# EAGLE board six4mix_stencil (EAGLE 9.6.2), part 1 of 2
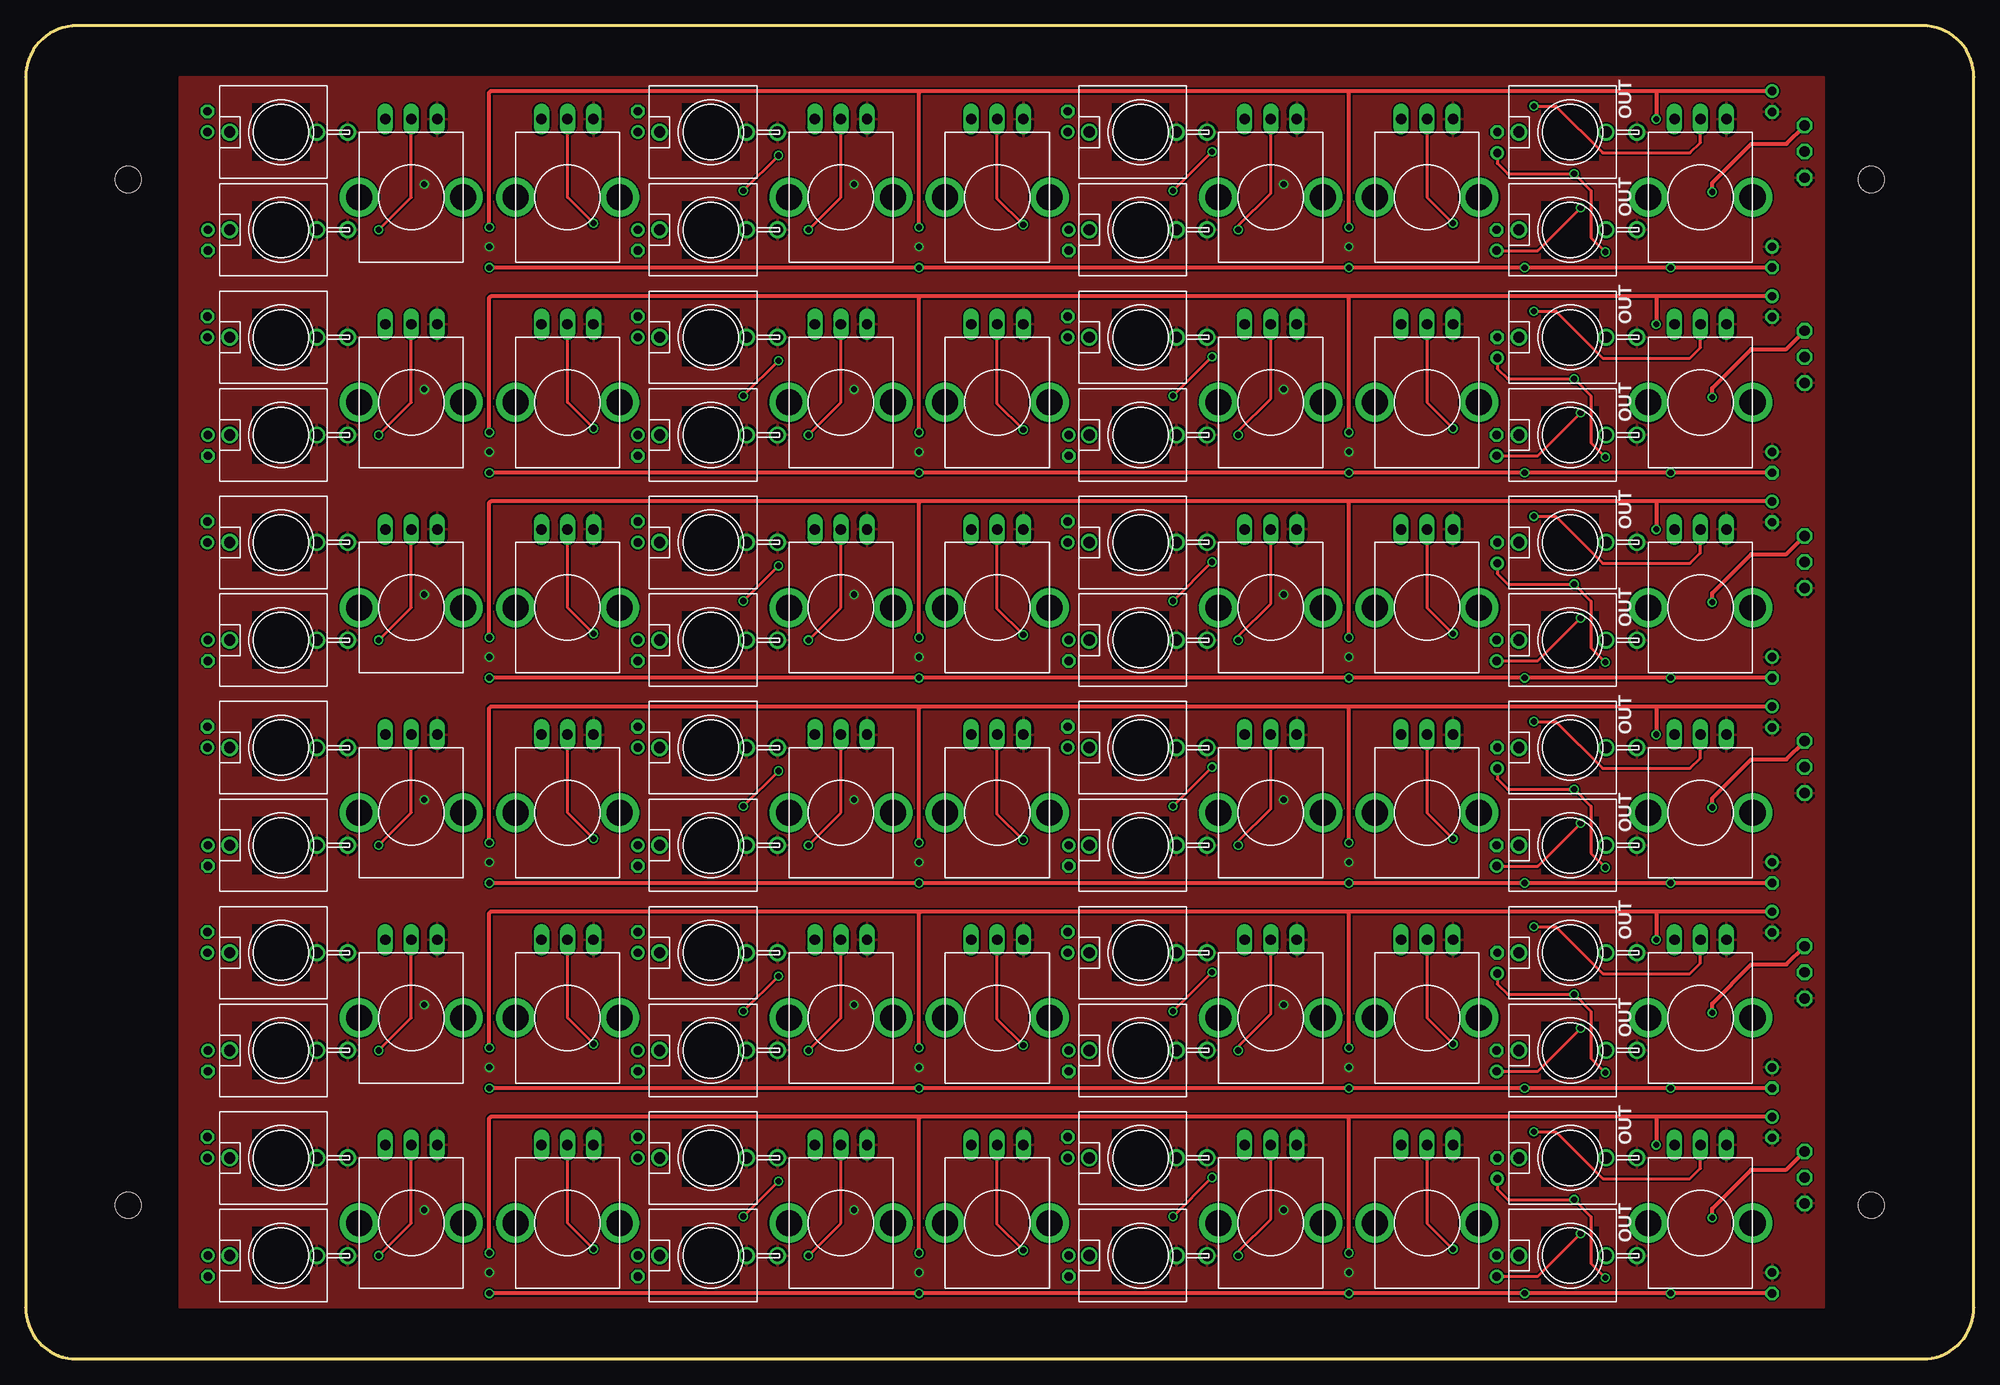
[diagram p0: board, top side]
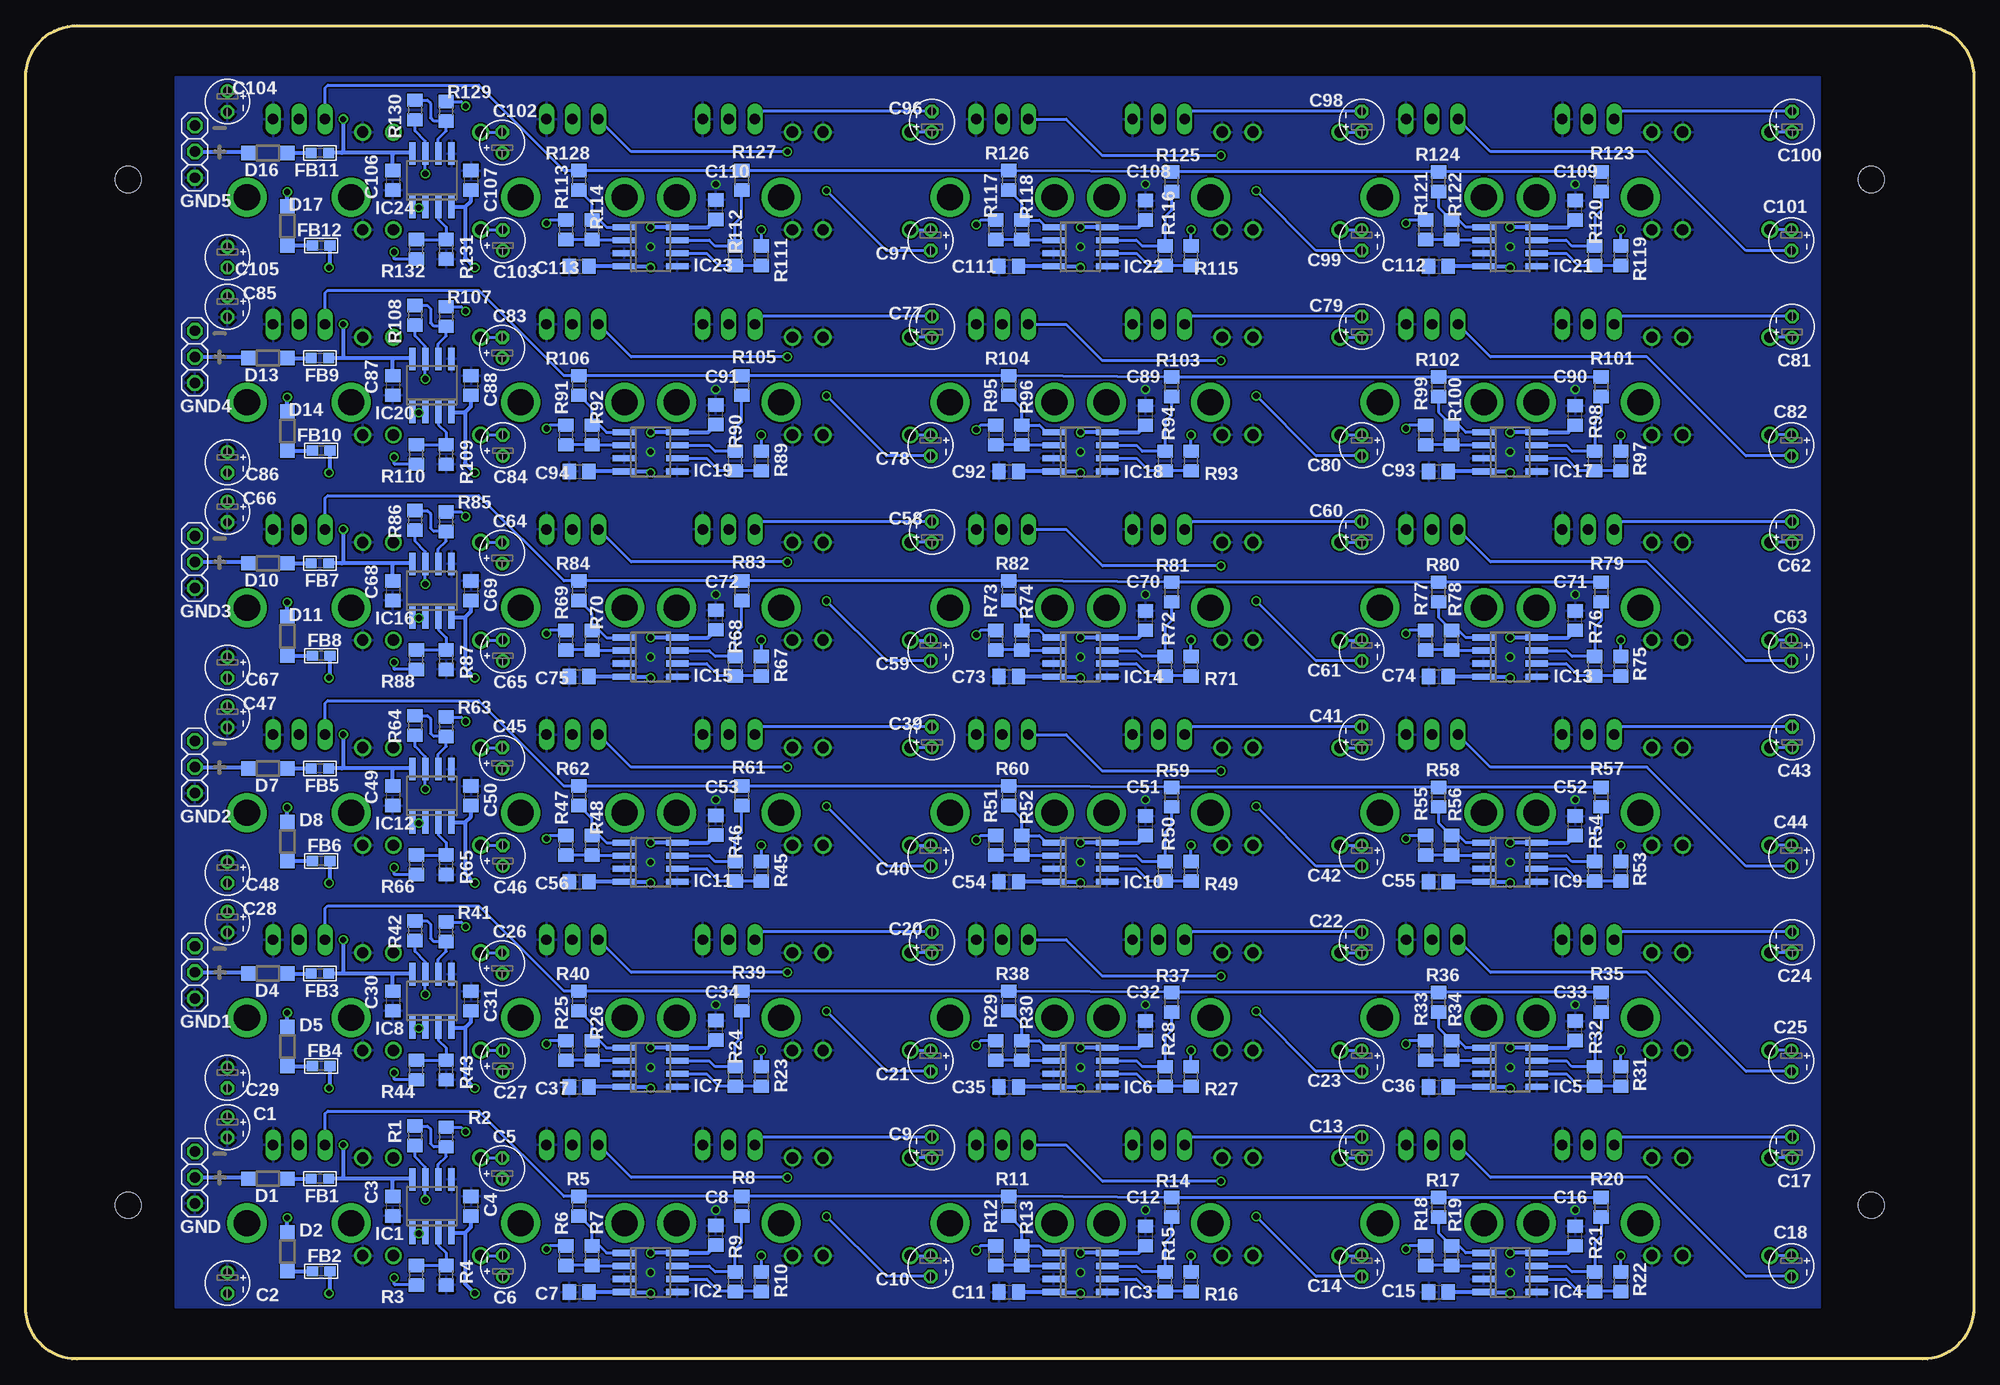
[diagram p1: board, bottom side, seen from below]

Size 190 x 130 mm. Coordinates in mm from the lower left corner, seen from the top.
Outline: 0,125 0,5 arc90 5,0 185,0 arc90 190,5 190,125 arc90 185,130 5,130 arc90 0,125
Copper layers (1*16): Top 0.035mm / dielectric 1.5mm / Bottom 0.035mm
Design rules "hackvana": minimum track width 6mil, minimum drill 0.3mm, track to track 6mil, track to pad 9mil, pad to pad 6mil, via to via 6mil, smd to smd 0mil, copper to edge 6mil, drill to drill 6mil, minimum pad ring 10mil, minimum via ring 6mil, stop-mask expansion 2mil, vias tented up to drill 100mil, thermal gap 10mil
Holes 2.54 mm at 10,115 180,115 180,15 10,15

## Footprints (pad centres in the part's own frame; a part is rotated, then mirrored left to right if it is on the bottom)
1X01 = drill 1.016 octagon: 1 0,0
WQP-PJ301M-12_JACK = drill 1.1: P$1 0,5; P$2 0,-3.5; P$3 0,-6.5
E2-4 = drill 0.813 pad 1.27: + -1.016,0 | drill 0.813 pad 1.27 octagon: - 1.016,0
C0805 = smd 1.3 x 1.5: 1 -0.95,0; 2 0.95,0
SOD123 = smd 1.4 x 1.4: A 1.9,0; C -1.9,0
0603 = smd 1.1 x 1: 1 -0.85,0; 2 0.85,0
SO08 = smd 0.6 x 2.2: 1 -1.905,-2.6; 2 -0.635,-2.6; 3 0.635,-2.6; 4 1.905,-2.6; 5 1.905,2.6; 6 0.635,2.6; 7 -0.635,2.6; 8 -1.905,2.6
SMALL_ALPS_POT = drill 1.016 long: A -2.54,-7.62; B 2.54,-7.62; W 0,-7.62 | drill 2.54 pad 3.81: GND@1 -5.08,0; GND@2 5.08,0
R0805 = smd 1.3 x 1.5: 1 -0.95,0; 2 0.95,0

## Placement (x,y rotation side)
+1  [1X01]  173.5,37.7 0 bottom
+2  [1X01]  173.5,57.7 0 bottom
+3  [1X01]  173.5,77.71 0 bottom
+4  [1X01]  173.5,97.71 0 bottom
+5  [1X01]  173.5,117.71 0 bottom
+12  [1X01]  173.5,17.7 0 bottom
-1  [1X01]  173.5,40.24 0 bottom
-2  [1X01]  173.5,60.24 0 bottom
-3  [1X01]  173.5,80.25 0 bottom
-4  [1X01]  173.5,100.25 0 bottom
-5  [1X01]  173.5,120.25 0 bottom
-12  [1X01]  173.5,20.24 0 bottom
A  WQP-PJ301M-12_JACK  [WQP-PJ301M-12_JACK]  24.91,19.61 90 top
A1  WQP-PJ301M-12_JACK  [WQP-PJ301M-12_JACK]  24.91,39.61 90 top
A2  WQP-PJ301M-12_JACK  [WQP-PJ301M-12_JACK]  24.91,59.61 90 top
A3  WQP-PJ301M-12_JACK  [WQP-PJ301M-12_JACK]  24.91,79.61 90 top
A4  WQP-PJ301M-12_JACK  [WQP-PJ301M-12_JACK]  24.91,99.61 90 top
A5  WQP-PJ301M-12_JACK  [WQP-PJ301M-12_JACK]  24.91,119.62 90 top
B  WQP-PJ301M-12_JACK  [WQP-PJ301M-12_JACK]  24.91,10.08 90 top
B1  WQP-PJ301M-12_JACK  [WQP-PJ301M-12_JACK]  24.91,30.08 90 top
B2  WQP-PJ301M-12_JACK  [WQP-PJ301M-12_JACK]  24.91,50.09 90 top
B3  WQP-PJ301M-12_JACK  [WQP-PJ301M-12_JACK]  24.91,70.09 90 top
B4  WQP-PJ301M-12_JACK  [WQP-PJ301M-12_JACK]  24.91,90.09 90 top
B5  WQP-PJ301M-12_JACK  [WQP-PJ301M-12_JACK]  24.91,110.09 90 top
C  WQP-PJ301M-12_JACK  [WQP-PJ301M-12_JACK]  66.82,19.61 90 top
C1  [E2-4]  170.32,22.59 270 bottom
C2  [E2-4]  170.32,7.41 270 bottom
C3  [C0805]  154.19,14.91 270 bottom
C4  [C0805]  146.57,14.91 270 bottom
C5  [E2-4]  143.52,18.59 90 bottom
C6  [E2-4]  143.46,9.06 90 bottom
C7  [C0805]  136.03,6.52 0 bottom
C8  [C0805]  122.7,12.05 90 bottom
C9  [E2-4]  101.61,20.62 90 bottom
C10  [E2-4]  101.74,9.06 270 bottom
C11  [C0805]  94.12,6.52 0 bottom
C12  [C0805]  80.79,11.98 90 bottom
C13  [E2-4]  59.7,20.62 90 bottom
C14  [E2-4]  59.7,9.06 270 bottom
C15  [C0805]  52.21,6.52 0 bottom
C16  [C0805]  38.88,11.98 90 bottom
C17  [E2-4]  17.73,20.62 90 bottom
C18  [E2-4]  17.79,9.06 270 bottom
C19  WQP-PJ301M-12_JACK  [WQP-PJ301M-12_JACK]  66.82,39.61 90 top
C20  [E2-4]  101.61,40.62 90 bottom
C21  [E2-4]  101.74,29.07 270 bottom
C22  [E2-4]  59.7,40.62 90 bottom
C23  [E2-4]  59.7,29.07 270 bottom
C24  [E2-4]  17.73,40.62 90 bottom
C25  [E2-4]  17.79,29.07 270 bottom
C26  [E2-4]  143.52,38.59 90 bottom
C27  [E2-4]  143.46,29.07 90 bottom
C28  [E2-4]  170.32,42.59 270 bottom
C29  [E2-4]  170.32,27.42 270 bottom
C30  [C0805]  154.19,34.91 270 bottom
C31  [C0805]  146.57,34.91 270 bottom
C32  [C0805]  80.79,31.99 90 bottom
C33  [C0805]  38.88,31.99 90 bottom
C34  [C0805]  122.7,32.05 90 bottom
C35  [C0805]  94.12,26.53 0 bottom
C36  [C0805]  52.21,26.53 0 bottom
C37  [C0805]  136.03,26.53 0 bottom
C38  WQP-PJ301M-12_JACK  [WQP-PJ301M-12_JACK]  66.82,59.61 90 top
C39  [E2-4]  101.61,60.63 90 bottom
C40  [E2-4]  101.74,49.07 270 bottom
C41  [E2-4]  59.7,60.63 90 bottom
C42  [E2-4]  59.7,49.07 270 bottom
C43  [E2-4]  17.73,60.63 90 bottom
C44  [E2-4]  17.79,49.07 270 bottom
C45  [E2-4]  143.52,58.59 90 bottom
C46  [E2-4]  143.46,49.07 90 bottom
C47  [E2-4]  170.32,62.59 270 bottom
C48  [E2-4]  170.32,47.42 270 bottom
C49  [C0805]  154.19,54.91 270 bottom
C50  [C0805]  146.57,54.91 270 bottom
C51  [C0805]  80.79,51.99 90 bottom
C52  [C0805]  38.88,51.99 90 bottom
C53  [C0805]  122.7,52.05 90 bottom
C54  [C0805]  94.12,46.53 0 bottom
C55  [C0805]  52.21,46.53 0 bottom
C56  [C0805]  136.03,46.53 0 bottom
C57  WQP-PJ301M-12_JACK  [WQP-PJ301M-12_JACK]  66.82,79.61 90 top
C58  [E2-4]  101.61,80.63 90 bottom
C59  [E2-4]  101.74,69.07 270 bottom
C60  [E2-4]  59.7,80.63 90 bottom
C61  [E2-4]  59.7,69.07 270 bottom
C62  [E2-4]  17.73,80.63 90 bottom
C63  [E2-4]  17.79,69.07 270 bottom
C64  [E2-4]  143.52,78.6 90 bottom
C65  [E2-4]  143.46,69.07 90 bottom
C66  [E2-4]  170.32,82.6 270 bottom
C67  [E2-4]  170.32,67.42 270 bottom
C68  [C0805]  154.19,74.91 270 bottom
C69  [C0805]  146.57,74.91 270 bottom
C70  [C0805]  80.79,71.99 90 bottom
C71  [C0805]  38.88,71.99 90 bottom
C72  [C0805]  122.7,72.06 90 bottom
C73  [C0805]  94.12,66.53 0 bottom
C74  [C0805]  52.21,66.53 0 bottom
C75  [C0805]  136.03,66.53 0 bottom
C76  WQP-PJ301M-12_JACK  [WQP-PJ301M-12_JACK]  66.82,99.61 90 top
C77  [E2-4]  101.61,100.63 90 bottom
C78  [E2-4]  101.74,89.07 270 bottom
C79  [E2-4]  59.7,100.63 90 bottom
C80  [E2-4]  59.7,89.07 270 bottom
C81  [E2-4]  17.73,100.63 90 bottom
C82  [E2-4]  17.79,89.07 270 bottom
C83  [E2-4]  143.52,98.6 90 bottom
C84  [E2-4]  143.46,89.07 90 bottom
C85  [E2-4]  170.32,102.6 270 bottom
C86  [E2-4]  170.32,87.42 270 bottom
C87  [C0805]  154.19,94.92 270 bottom
C88  [C0805]  146.57,94.92 270 bottom
C89  [C0805]  80.79,92 90 bottom
C90  [C0805]  38.88,92 90 bottom
C91  [C0805]  122.7,92.06 90 bottom
C92  [C0805]  94.12,86.53 0 bottom
C93  [C0805]  52.21,86.53 0 bottom
C94  [C0805]  136.03,86.53 0 bottom
C95  WQP-PJ301M-12_JACK  [WQP-PJ301M-12_JACK]  66.82,119.62 90 top
C96  [E2-4]  101.61,120.63 90 bottom
C97  [E2-4]  101.74,109.08 270 bottom
C98  [E2-4]  59.7,120.63 90 bottom
C99  [E2-4]  59.7,109.08 270 bottom
C100  [E2-4]  17.73,120.63 90 bottom
C101  [E2-4]  17.79,109.08 270 bottom
C102  [E2-4]  143.52,118.6 90 bottom
C103  [E2-4]  143.46,109.08 90 bottom
C104  [E2-4]  170.32,122.6 270 bottom
C105  [E2-4]  170.32,107.43 270 bottom
C106  [C0805]  154.19,114.92 270 bottom
C107  [C0805]  146.57,114.92 270 bottom
C108  [C0805]  80.79,112 90 bottom
C109  [C0805]  38.88,112 90 bottom
C110  [C0805]  122.7,112.06 90 bottom
C111  [C0805]  94.12,106.54 0 bottom
C112  [C0805]  52.21,106.54 0 bottom
C113  [C0805]  136.03,106.54 0 bottom
D  WQP-PJ301M-12_JACK  [WQP-PJ301M-12_JACK]  66.82,10.08 90 top
D1  MBR0520LT  [SOD123]  166.38,17.57 180 bottom
D2  MBR0520LT  [SOD123]  164.48,10.46 270 bottom
D3  WQP-PJ301M-12_JACK  [WQP-PJ301M-12_JACK]  66.82,30.08 90 top
D4  MBR0520LT  [SOD123]  166.38,37.58 180 bottom
D5  MBR0520LT  [SOD123]  164.48,30.46 270 bottom
D6  WQP-PJ301M-12_JACK  [WQP-PJ301M-12_JACK]  66.82,50.09 90 top
D7  MBR0520LT  [SOD123]  166.38,57.58 180 bottom
D8  MBR0520LT  [SOD123]  164.48,50.47 270 bottom
D9  WQP-PJ301M-12_JACK  [WQP-PJ301M-12_JACK]  66.82,70.09 90 top
D10  MBR0520LT  [SOD123]  166.38,77.58 180 bottom
D11  MBR0520LT  [SOD123]  164.48,70.47 270 bottom
D12  WQP-PJ301M-12_JACK  [WQP-PJ301M-12_JACK]  66.82,90.09 90 top
D13  MBR0520LT  [SOD123]  166.38,97.58 180 bottom
D14  MBR0520LT  [SOD123]  164.48,90.47 270 bottom
D15  WQP-PJ301M-12_JACK  [WQP-PJ301M-12_JACK]  66.82,110.09 90 top
D16  MBR0520LT  [SOD123]  166.38,117.59 180 bottom
D17  MBR0520LT  [SOD123]  164.48,110.47 270 bottom
E  WQP-PJ301M-12_JACK  [WQP-PJ301M-12_JACK]  108.73,19.61 90 top
E1  WQP-PJ301M-12_JACK  [WQP-PJ301M-12_JACK]  108.73,39.61 90 top
E2  WQP-PJ301M-12_JACK  [WQP-PJ301M-12_JACK]  108.73,59.61 90 top
E3  WQP-PJ301M-12_JACK  [WQP-PJ301M-12_JACK]  108.73,79.61 90 top
E4  WQP-PJ301M-12_JACK  [WQP-PJ301M-12_JACK]  108.73,99.61 90 top
E5  WQP-PJ301M-12_JACK  [WQP-PJ301M-12_JACK]  108.73,119.62 90 top
EURO  WQP-PJ301M-12_JACK  [WQP-PJ301M-12_JACK]  150.64,19.61 90 top
EURO1  WQP-PJ301M-12_JACK  [WQP-PJ301M-12_JACK]  150.64,39.61 90 top
EURO2  WQP-PJ301M-12_JACK  [WQP-PJ301M-12_JACK]  150.64,59.61 90 top
EURO3  WQP-PJ301M-12_JACK  [WQP-PJ301M-12_JACK]  150.64,79.61 90 top
EURO4  WQP-PJ301M-12_JACK  [WQP-PJ301M-12_JACK]  150.64,99.61 90 top
EURO5  WQP-PJ301M-12_JACK  [WQP-PJ301M-12_JACK]  150.64,119.62 90 top
F  WQP-PJ301M-12_JACK  [WQP-PJ301M-12_JACK]  108.73,10.08 90 top
F1  WQP-PJ301M-12_JACK  [WQP-PJ301M-12_JACK]  108.73,30.08 90 top
F2  WQP-PJ301M-12_JACK  [WQP-PJ301M-12_JACK]  108.73,50.09 90 top
F3  WQP-PJ301M-12_JACK  [WQP-PJ301M-12_JACK]  108.73,70.09 90 top
F4  WQP-PJ301M-12_JACK  [WQP-PJ301M-12_JACK]  108.73,90.09 90 top
F5  WQP-PJ301M-12_JACK  [WQP-PJ301M-12_JACK]  108.73,110.09 90 top
FB1  [0603]  161.3,17.57 180 bottom
FB2  [0603]  161.18,8.56 180 bottom
FB3  [0603]  161.3,37.58 180 bottom
FB4  [0603]  161.18,28.56 180 bottom
FB5  [0603]  161.3,57.58 180 bottom
FB6  [0603]  161.18,48.56 180 bottom
FB7  [0603]  161.3,77.58 180 bottom
FB8  [0603]  161.18,68.56 180 bottom
FB9  [0603]  161.3,97.58 180 bottom
FB10  [0603]  161.18,88.57 180 bottom
FB11  [0603]  161.3,117.59 180 bottom
FB12  [0603]  161.18,108.57 180 bottom
GND  [1X01]  173.5,15.16 0 bottom
GND1  [1X01]  173.5,35.16 0 bottom
GND2  [1X01]  173.5,55.16 0 bottom
GND3  [1X01]  173.5,75.17 0 bottom
GND4  [1X01]  173.5,95.17 0 bottom
GND5  [1X01]  173.5,115.17 0 bottom
IC1  TL072D  [SO08]  150.38,14.91 0 bottom
IC2  TL072D  [SO08]  129.05,8.43 270 bottom
IC3  TL072D  [SO08]  87.14,8.43 270 bottom
IC4  TL072D  [SO08]  45.23,8.43 270 bottom
IC5  TL072D  [SO08]  45.23,28.43 270 bottom
IC6  TL072D  [SO08]  87.14,28.43 270 bottom
IC7  TL072D  [SO08]  129.05,28.43 270 bottom
IC8  TL072D  [SO08]  150.38,34.91 0 bottom
IC9  TL072D  [SO08]  45.23,48.43 270 bottom
IC10  TL072D  [SO08]  87.14,48.43 270 bottom
IC11  TL072D  [SO08]  129.05,48.43 270 bottom
IC12  TL072D  [SO08]  150.38,54.91 0 bottom
IC13  TL072D  [SO08]  45.23,68.44 270 bottom
IC14  TL072D  [SO08]  87.14,68.44 270 bottom
IC15  TL072D  [SO08]  129.05,68.44 270 bottom
IC16  TL072D  [SO08]  150.38,74.91 0 bottom
IC17  TL072D  [SO08]  45.23,88.44 270 bottom
IC18  TL072D  [SO08]  87.14,88.44 270 bottom
IC19  TL072D  [SO08]  129.05,88.44 270 bottom
IC20  TL072D  [SO08]  150.38,94.92 0 bottom
IC21  TL072D  [SO08]  45.23,108.44 270 bottom
IC22  TL072D  [SO08]  87.14,108.44 270 bottom
IC23  TL072D  [SO08]  129.05,108.44 270 bottom
IC24  TL072D  [SO08]  150.38,114.92 0 bottom
LINE  WQP-PJ301M-12_JACK  [WQP-PJ301M-12_JACK]  150.64,10.08 90 top
LINE1  WQP-PJ301M-12_JACK  [WQP-PJ301M-12_JACK]  150.64,30.08 90 top
LINE2  WQP-PJ301M-12_JACK  [WQP-PJ301M-12_JACK]  150.64,50.09 90 top
LINE3  WQP-PJ301M-12_JACK  [WQP-PJ301M-12_JACK]  150.64,70.09 90 top
LINE4  WQP-PJ301M-12_JACK  [WQP-PJ301M-12_JACK]  150.64,90.09 90 top
LINE5  WQP-PJ301M-12_JACK  [WQP-PJ301M-12_JACK]  150.64,110.09 90 top
LVLA  ALPS_POT_SMALL  [SMALL_ALPS_POT]  37.61,13.26 180 top
LVLA1  ALPS_POT_SMALL  [SMALL_ALPS_POT]  37.61,33.26 180 top
LVLA2  ALPS_POT_SMALL  [SMALL_ALPS_POT]  37.61,53.26 180 top
LVLA3  ALPS_POT_SMALL  [SMALL_ALPS_POT]  37.61,73.26 180 top
LVLA4  ALPS_POT_SMALL  [SMALL_ALPS_POT]  37.61,93.27 180 top
LVLA5  ALPS_POT_SMALL  [SMALL_ALPS_POT]  37.61,113.27 180 top
LVLB  ALPS_POT_SMALL  [SMALL_ALPS_POT]  52.85,13.26 180 top
LVLB1  ALPS_POT_SMALL  [SMALL_ALPS_POT]  52.85,33.26 180 top
LVLB2  ALPS_POT_SMALL  [SMALL_ALPS_POT]  52.85,53.26 180 top
LVLB3  ALPS_POT_SMALL  [SMALL_ALPS_POT]  52.85,73.26 180 top
LVLB4  ALPS_POT_SMALL  [SMALL_ALPS_POT]  52.85,93.27 180 top
LVLB5  ALPS_POT_SMALL  [SMALL_ALPS_POT]  52.85,113.27 180 top
LVLC  ALPS_POT_SMALL  [SMALL_ALPS_POT]  79.52,13.26 180 top
LVLC1  ALPS_POT_SMALL  [SMALL_ALPS_POT]  79.52,33.26 180 top
LVLC2  ALPS_POT_SMALL  [SMALL_ALPS_POT]  79.52,53.26 180 top
LVLC3  ALPS_POT_SMALL  [SMALL_ALPS_POT]  79.52,73.26 180 top
LVLC4  ALPS_POT_SMALL  [SMALL_ALPS_POT]  79.52,93.27 180 top
LVLC5  ALPS_POT_SMALL  [SMALL_ALPS_POT]  79.52,113.27 180 top
LVLD  ALPS_POT_SMALL  [SMALL_ALPS_POT]  94.76,13.26 180 top
LVLD1  ALPS_POT_SMALL  [SMALL_ALPS_POT]  94.76,33.26 180 top
LVLD2  ALPS_POT_SMALL  [SMALL_ALPS_POT]  94.76,53.26 180 top
LVLD3  ALPS_POT_SMALL  [SMALL_ALPS_POT]  94.76,73.26 180 top
LVLD4  ALPS_POT_SMALL  [SMALL_ALPS_POT]  94.76,93.27 180 top
LVLD5  ALPS_POT_SMALL  [SMALL_ALPS_POT]  94.76,113.27 180 top
LVLE  ALPS_POT_SMALL  [SMALL_ALPS_POT]  121.43,13.26 180 top
LVLE1  ALPS_POT_SMALL  [SMALL_ALPS_POT]  121.43,33.26 180 top
LVLE2  ALPS_POT_SMALL  [SMALL_ALPS_POT]  121.43,53.26 180 top
LVLE3  ALPS_POT_SMALL  [SMALL_ALPS_POT]  121.43,73.26 180 top
LVLE4  ALPS_POT_SMALL  [SMALL_ALPS_POT]  121.43,93.27 180 top
LVLE5  ALPS_POT_SMALL  [SMALL_ALPS_POT]  121.43,113.27 180 top
LVLF  ALPS_POT_SMALL  [SMALL_ALPS_POT]  136.67,13.26 180 top
LVLF1  ALPS_POT_SMALL  [SMALL_ALPS_POT]  136.67,33.26 180 top
LVLF2  ALPS_POT_SMALL  [SMALL_ALPS_POT]  136.67,53.26 180 top
LVLF3  ALPS_POT_SMALL  [SMALL_ALPS_POT]  136.67,73.26 180 top
LVLF4  ALPS_POT_SMALL  [SMALL_ALPS_POT]  136.67,93.27 180 top
LVLF5  ALPS_POT_SMALL  [SMALL_ALPS_POT]  136.67,113.27 180 top
R1  100k  [R0805]  152.03,21.76 270 bottom
R2  10k  [R0805]  148.99,21.64 270 bottom
R3  47k  [R0805]  151.91,8.18 90 bottom
R4  10k  [R0805]  148.99,8.18 90 bottom
R5  [R0805]  136.03,14.91 90 bottom
R6  4k7  [R0805]  137.3,10.08 270 bottom
R7  10k  [R0805]  134.76,10.08 90 bottom
R8  [R0805]  120.16,14.91 90 bottom
R9  10k  [R0805]  120.79,7.54 90 bottom
R10  4k7  [R0805]  118.25,7.54 270 bottom
R11  [R0805]  94.12,14.91 90 bottom
R12  4k7  [R0805]  95.39,10.08 270 bottom
R13  10k  [R0805]  92.85,10.08 90 bottom
R14  [R0805]  78.25,14.78 90 bottom
R15  10k  [R0805]  78.88,7.54 90 bottom
R16  4k7  [R0805]  76.34,7.54 270 bottom
R17  [R0805]  52.21,14.78 90 bottom
R18  4k7  [R0805]  53.48,10.08 270 bottom
R19  10k  [R0805]  50.94,10.08 90 bottom
R20  [R0805]  36.34,14.78 90 bottom
R21  10k  [R0805]  36.97,7.54 90 bottom
R22  4k7  [R0805]  34.43,7.54 270 bottom
R23  4k7  [R0805]  118.25,27.54 270 bottom
R24  10k  [R0805]  120.79,27.54 90 bottom
R25  4k7  [R0805]  137.3,30.08 270 bottom
R26  10k  [R0805]  134.76,30.08 90 bottom
R27  4k7  [R0805]  76.34,27.54 270 bottom
R28  10k  [R0805]  78.88,27.54 90 bottom
R29  4k7  [R0805]  95.39,30.08 270 bottom
R30  10k  [R0805]  92.85,30.08 90 bottom
R31  4k7  [R0805]  34.43,27.54 270 bottom
R32  10k  [R0805]  36.97,27.54 90 bottom
R33  4k7  [R0805]  53.48,30.08 270 bottom
R34  10k  [R0805]  50.94,30.08 90 bottom
R35  [R0805]  36.34,34.78 90 bottom
R36  [R0805]  52.21,34.78 90 bottom
R37  [R0805]  78.25,34.78 90 bottom
R38  [R0805]  94.12,34.91 90 bottom
R39  [R0805]  120.16,34.91 90 bottom
R40  [R0805]  136.03,34.91 90 bottom
R41  10k  [R0805]  148.99,41.64 270 bottom
R42  100k  [R0805]  152.03,41.77 270 bottom
R43  10k  [R0805]  148.99,28.18 90 bottom
R44  47k  [R0805]  151.91,28.18 90 bottom
R45  4k7  [R0805]  118.25,47.55 270 bottom
R46  10k  [R0805]  120.79,47.55 90 bottom
R47  4k7  [R0805]  137.3,50.09 270 bottom
R48  10k  [R0805]  134.76,50.09 90 bottom
R49  4k7  [R0805]  76.34,47.55 270 bottom
R50  10k  [R0805]  78.88,47.55 90 bottom
R51  4k7  [R0805]  95.39,50.09 270 bottom
R52  10k  [R0805]  92.85,50.09 90 bottom
R53  4k7  [R0805]  34.43,47.55 270 bottom
R54  10k  [R0805]  36.97,47.55 90 bottom
R55  4k7  [R0805]  53.48,50.09 270 bottom
R56  10k  [R0805]  50.94,50.09 90 bottom
R57  [R0805]  36.34,54.78 90 bottom
R58  [R0805]  52.21,54.78 90 bottom
R59  [R0805]  78.25,54.78 90 bottom
R60  [R0805]  94.12,54.91 90 bottom
R61  [R0805]  120.16,54.91 90 bottom
R62  [R0805]  136.03,54.91 90 bottom
R63  10k  [R0805]  148.99,61.64 270 bottom
R64  100k  [R0805]  152.03,61.77 270 bottom
R65  10k  [R0805]  148.99,48.18 90 bottom
R66  47k  [R0805]  151.91,48.18 90 bottom
R67  4k7  [R0805]  118.25,67.55 270 bottom
R68  10k  [R0805]  120.79,67.55 90 bottom
R69  4k7  [R0805]  137.3,70.09 270 bottom
R70  10k  [R0805]  134.76,70.09 90 bottom
R71  4k7  [R0805]  76.34,67.55 270 bottom
R72  10k  [R0805]  78.88,67.55 90 bottom
R73  4k7  [R0805]  95.39,70.09 270 bottom
R74  10k  [R0805]  92.85,70.09 90 bottom
R75  4k7  [R0805]  34.43,67.55 270 bottom
R76  10k  [R0805]  36.97,67.55 90 bottom
R77  4k7  [R0805]  53.48,70.09 270 bottom
R78  10k  [R0805]  50.94,70.09 90 bottom
R79  [R0805]  36.34,74.79 90 bottom
R80  [R0805]  52.21,74.79 90 bottom
R81  [R0805]  78.25,74.79 90 bottom
R82  [R0805]  94.12,74.91 90 bottom
R83  [R0805]  120.16,74.91 90 bottom
R84  [R0805]  136.03,74.91 90 bottom
R85  10k  [R0805]  148.99,81.64 270 bottom
R86  100k  [R0805]  152.03,81.77 270 bottom
R87  10k  [R0805]  148.99,68.18 90 bottom
R88  47k  [R0805]  151.91,68.18 90 bottom
R89  4k7  [R0805]  118.25,87.55 270 bottom
R90  10k  [R0805]  120.79,87.55 90 bottom
R91  4k7  [R0805]  137.3,90.09 270 bottom
R92  10k  [R0805]  134.76,90.09 90 bottom
R93  4k7  [R0805]  76.34,87.55 270 bottom
R94  10k  [R0805]  78.88,87.55 90 bottom
R95  4k7  [R0805]  95.39,90.09 270 bottom
R96  10k  [R0805]  92.85,90.09 90 bottom
R97  4k7  [R0805]  34.43,87.55 270 bottom
R98  10k  [R0805]  36.97,87.55 90 bottom
R99  4k7  [R0805]  53.48,90.09 270 bottom
R100  10k  [R0805]  50.94,90.09 90 bottom
R101  [R0805]  36.34,94.79 90 bottom
R102  [R0805]  52.21,94.79 90 bottom
R103  [R0805]  78.25,94.79 90 bottom
R104  [R0805]  94.12,94.92 90 bottom
R105  [R0805]  120.16,94.92 90 bottom
R106  [R0805]  136.03,94.92 90 bottom
R107  10k  [R0805]  148.99,101.65 270 bottom
R108  100k  [R0805]  152.03,101.77 270 bottom
R109  10k  [R0805]  148.99,88.19 90 bottom
R110  47k  [R0805]  151.91,88.19 90 bottom
R111  4k7  [R0805]  118.25,107.55 270 bottom
R112  10k  [R0805]  120.79,107.55 90 bottom
R113  4k7  [R0805]  137.3,110.09 270 bottom
R114  10k  [R0805]  134.76,110.09 90 bottom
R115  4k7  [R0805]  76.34,107.55 270 bottom
R116  10k  [R0805]  78.88,107.55 90 bottom
R117  4k7  [R0805]  95.39,110.09 270 bottom
R118  10k  [R0805]  92.85,110.09 90 bottom
R119  4k7  [R0805]  34.43,107.55 270 bottom
R120  10k  [R0805]  36.97,107.55 90 bottom
R121  4k7  [R0805]  53.48,110.09 270 bottom
R122  10k  [R0805]  50.94,110.09 90 bottom
R123  [R0805]  36.34,114.79 90 bottom
R124  [R0805]  52.21,114.79 90 bottom
R125  [R0805]  78.25,114.79 90 bottom
R126  [R0805]  94.12,114.92 90 bottom
R127  [R0805]  120.16,114.92 90 bottom
R128  [R0805]  136.03,114.92 90 bottom
R129  10k  [R0805]  148.99,121.65 270 bottom
R130  100k  [R0805]  152.03,121.78 270 bottom
R131  10k  [R0805]  148.99,108.19 90 bottom
R132  47k  [R0805]  151.91,108.19 90 bottom
VOL  ALPS_POT_SMALL  [SMALL_ALPS_POT]  163.34,13.26 180 top
VOL1  ALPS_POT_SMALL  [SMALL_ALPS_POT]  163.34,33.26 180 top
VOL2  ALPS_POT_SMALL  [SMALL_ALPS_POT]  163.34,53.26 180 top
VOL3  ALPS_POT_SMALL  [SMALL_ALPS_POT]  163.34,73.26 180 top
VOL4  ALPS_POT_SMALL  [SMALL_ALPS_POT]  163.34,93.27 180 top
VOL5  ALPS_POT_SMALL  [SMALL_ALPS_POT]  163.34,113.27 180 top

## Library data of the parts
+1-+5 +12 -1--5 -12 GND GND1-GND5 = pinhead
A A1-A5 B B1-B5 C C19 C38 C57 C76 C95 D D3 D6 D9 D12 D15 E E1-E5 EURO EURO1-EURO5 F F1-F5 LINE LINE1-LINE5 = thonkiconn
C1 C2 C5 C6 C9 C10 C13 C14 C17 C18 C20-C29 C39-C48 C58-C67 C77-C86 C96-C105 = resistor
C3 C4 C7 C8 C11 C12 C15 C16 C30-C37 C49-C56 C68-C75 C87-C94 C106-C113 R1-R132 = rcl
D1 D2 D4 D5 D7 D8 D10 D11 D13 D14 D16 D17 = diode
FB1-FB12 = microbuilder
IC1-IC24 = linear
LVLA LVLA1-LVLA5 LVLB LVLB1-LVLB5 LVLC LVLC1-LVLC5 LVLD LVLD1-LVLD5 LVLE LVLE1-LVLE5 LVLF LVLF1-LVLF5 VOL VOL1-VOL5 = jasons_stuff

## Nets
+12V: C1.+ C3.1 C8.1 C12.1 C16.1 FB1.1 IC1.8 IC2.8 IC3.8 IC4.8
+12V1: C28.+ C30.1 C32.1 C33.1 C34.1 FB3.1 IC5.8 IC6.8 IC7.8 IC8.8
+12V2: C47.+ C49.1 C51.1 C52.1 C53.1 FB5.1 IC9.8 IC10.8 IC11.8 IC12.8
+12V3: C66.+ C68.1 C70.1 C71.1 C72.1 FB7.1 IC13.8 IC14.8 IC15.8 IC16.8
+12V4: C85.+ C87.1 C89.1 C90.1 C91.1 FB9.1 IC17.8 IC18.8 IC19.8 IC20.8
+12V5: C104.+ C106.1 C108.1 C109.1 C110.1 FB11.1 IC21.8 IC22.8 IC23.8 IC24.8
-12V: C2.- C4.2 C7.2 C11.2 C15.2 FB2.1 IC1.4 IC2.4 IC3.4 IC4.4
-12V1: C29.- C31.2 C35.2 C36.2 C37.2 FB4.1 IC5.4 IC6.4 IC7.4 IC8.4
-12V2: C48.- C50.2 C54.2 C55.2 C56.2 FB6.1 IC9.4 IC10.4 IC11.4 IC12.4
-12V3: C67.- C69.2 C73.2 C74.2 C75.2 FB8.1 IC13.4 IC14.4 IC15.4 IC16.4
-12V4: C86.- C88.2 C92.2 C93.2 C94.2 FB10.1 IC17.4 IC18.4 IC19.4 IC20.4
-12V5: C105.- C107.2 C111.2 C112.2 C113.2 FB12.1 IC21.4 IC22.4 IC23.4 IC24.4
CH1: IC4.7 R20.1 R21.2
CH2: IC4.1 R17.1 R19.2
CH3: IC3.7 R14.1 R15.2
CH4: IC3.1 R11.1 R13.2
CH5: IC2.7 R8.1 R9.2
CH6: IC2.1 R5.1 R7.2
CH7: IC5.7 R32.2 R35.1
CH8: IC5.1 R34.2 R36.1
CH9: IC6.7 R28.2 R37.1
CH10: IC6.1 R30.2 R38.1
CH11: IC7.7 R24.2 R39.1
CH12: IC7.1 R26.2 R40.1
CH13: IC9.7 R54.2 R57.1
CH14: IC9.1 R56.2 R58.1
CH15: IC10.7 R50.2 R59.1
CH16: IC10.1 R52.2 R60.1
CH17: IC11.7 R46.2 R61.1
CH18: IC11.1 R48.2 R62.1
CH19: IC13.7 R76.2 R79.1
CH20: IC13.1 R78.2 R80.1
CH21: IC14.7 R72.2 R81.1
CH22: IC14.1 R74.2 R82.1
CH23: IC15.7 R68.2 R83.1
CH24: IC15.1 R70.2 R84.1
CH25: IC17.7 R98.2 R101.1
CH26: IC17.1 R100.2 R102.1
CH27: IC18.7 R94.2 R103.1
CH28: IC18.1 R96.2 R104.1
CH29: IC19.7 R90.2 R105.1
CH30: IC19.1 R92.2 R106.1
CH31: IC21.7 R120.2 R123.1
CH32: IC21.1 R122.2 R124.1
CH33: IC22.7 R116.2 R125.1
CH34: IC22.1 R118.2 R126.1
CH35: IC23.7 R112.2 R127.1
CH36: IC23.1 R114.2 R128.1
GND: A1.P$2 A1.P$3 A2.P$2 A2.P$3 A3.P$2 A3.P$3 A4.P$2 A4.P$3 A5.P$2 A5.P$3 A.P$2 A.P$3 B1.P$2 B1.P$3 B2.P$2 B2.P$3 B3.P$2 B3.P$3 B4.P$2 B4.P$3 B5.P$2 B5.P$3 B.P$2 B.P$3 C1.- C2.+ C3.2 C4.1 C7.1 C8.2 C11.1 C12.2 C15.1 C16.2 C19.P$2 C19.P$3 C28.- C29.+ C30.2 C31.1 C32.2 C33.2 C34.2 C35.1 C36.1 C37.1 C38.P$2 C38.P$3 C47.- C48.+ C49.2 C50.1 C51.2 C52.2 C53.2 C54.1 C55.1 C56.1 C57.P$2 C57.P$3 C66.- C67.+ C68.2 C69.1 C70.2 C71.2 C72.2 C73.1 C74.1 C75.1 C76.P$2 C76.P$3 C85.- C86.+ C87.2 C88.1 C89.2 C90.2 C91.2 C92.1 C93.1 C94.1 C95.P$2 C95.P$3 C104.- C105.+ C106.2 C107.1 C108.2 C109.2 C110.2 C111.1 C112.1 C113.1 C.P$2 C.P$3 D3.P$2 D3.P$3 D6.P$2 D6.P$3 D9.P$2 D9.P$3 D12.P$2 D12.P$3 D15.P$2 D15.P$3 D.P$2 D.P$3 E1.P$2 E1.P$3 E2.P$2 E2.P$3 E3.P$2 E3.P$3 E4.P$2 E4.P$3 E5.P$2 E5.P$3 E.P$2 E.P$3 EURO1.P$3 EURO2.P$3 EURO3.P$3 EURO4.P$3 EURO5.P$3 EURO.P$3 F1.P$2 F1.P$3 F2.P$2 F2.P$3 F3.P$2 F3.P$3 F4.P$2 F4.P$3 F5.P$2 F5.P$3 F.P$2 F.P$3 GND1.1 GND2.1 GND3.1 GND4.1 GND5.1 GND.1 IC1.5 IC2.3 IC2.5 IC3.3 IC3.5 IC4.3 IC4.5 IC5.3 IC5.5 IC6.3 IC6.5 IC7.3 IC7.5 IC8.5 IC9.3 IC9.5 IC10.3 IC10.5 IC11.3 IC11.5 IC12.5 IC13.3 IC13.5 IC14.3 IC14.5 IC15.3 IC15.5 IC16.5 IC17.3 IC17.5 IC18.3 IC18.5 IC19.3 IC19.5 IC20.5 IC21.3 IC21.5 IC22.3 IC22.5 IC23.3 IC23.5 IC24.5 LINE1.P$3 LINE2.P$3 LINE3.P$3 LINE4.P$3 LINE5.P$3 LINE.P$3 LVLA1.A LVLA2.A LVLA3.A LVLA4.A LVLA5.A LVLA.A LVLB1.A LVLB2.A LVLB3.A LVLB4.A LVLB5.A LVLB.A LVLC1.A LVLC2.A LVLC3.A LVLC4.A LVLC5.A LVLC.A LVLD1.A LVLD2.A LVLD3.A LVLD4.A LVLD5.A LVLD.A LVLE1.A LVLE2.A LVLE3.A LVLE4.A LVLE5.A LVLE.A LVLF1.A LVLF2.A LVLF3.A LVLF4.A LVLF5.A LVLF.A R4.1 R43.1 R65.1 R87.1 R109.1 R131.1 VOL1.A VOL2.A VOL3.A VOL4.A VOL5.A VOL.A
N$1: C9.+ E.P$1
N$2: C9.- LVLE.B
N$3: IC2.6 R9.1 R10.2
N$4: LVLE.W R10.1
N$5: C10.+ F.P$1
N$6: C10.- LVLF.B
N$7: IC2.2 R6.2 R7.1
N$8: LVLF.W R6.1
N$9: C13.+ C.P$1
N$10: C13.- LVLC.B
N$11: IC3.6 R15.1 R16.2
N$12: LVLC.W R16.1
N$13: C14.+ D.P$1
N$14: C14.- LVLD.B
N$15: IC3.2 R12.2 R13.1
N$16: LVLD.W R12.1
N$17: A.P$1 C17.+
N$18: C17.- LVLA.B
N$19: IC4.6 R21.1 R22.2
N$20: LVLA.W R22.1
N$21: B.P$1 C18.+
N$22: C18.- LVLB.B
N$23: IC4.2 R18.2 R19.1
N$24: LVLB.W R18.1
N$25: R5.2 R8.2 R11.2 R14.2 R17.2 R20.2 VOL.B
N$26: C5.- EURO.P$1
N$27: C6.- LINE.P$1
N$28: R2.1 VOL.W
N$29: IC1.6 R1.1 R2.2
N$30: C5.+ IC1.7 R1.2 R3.1
N$31: D1.C FB1.2
N$32: C6.+ IC1.1 IC1.2
N$33: IC1.3 R3.2 R4.2
N$34: +12.1 D1.A
N$35: D2.A FB2.2
N$36: -12.1 D2.C
N$37: C20.- LVLE1.B
N$38: IC7.6 R23.2 R24.1
N$39: C21.+ F1.P$1
N$40: C21.- LVLF1.B
N$41: IC7.2 R25.2 R26.1
N$42: LVLF1.W R25.1
N$43: C19.P$1 C22.+
N$44: C22.- LVLC1.B
N$45: IC6.6 R27.2 R28.1
N$46: LVLC1.W R27.1
N$47: C23.+ D3.P$1
N$48: C23.- LVLD1.B
N$49: IC6.2 R29.2 R30.1
N$50: LVLD1.W R29.1
N$51: A1.P$1 C24.+
N$52: C24.- LVLA1.B
N$53: IC5.6 R31.2 R32.1
N$54: LVLA1.W R31.1
N$55: B1.P$1 C25.+
N$56: C25.- LVLB1.B
N$57: IC5.2 R33.2 R34.1
N$58: LVLB1.W R33.1
N$59: LVLE1.W R23.1
N$60: C20.+ E1.P$1
N$61: R35.2 R36.2 R37.2 R38.2 R39.2 R40.2 VOL1.B
N$62: R41.1 VOL1.W
N$63: IC8.6 R41.2 R42.1
N$64: C26.+ IC8.7 R42.2 R44.1
N$65: C26.- EURO1.P$1
N$66: C27.- LINE1.P$1
N$67: C27.+ IC8.1 IC8.2
N$68: IC8.3 R43.2 R44.2
N$69: D4.C FB3.2
N$70: +1.1 D4.A
N$71: D5.A FB4.2
N$72: -1.1 D5.C
N$73: C39.- LVLE2.B
N$74: IC11.6 R45.2 R46.1
N$75: C40.+ F2.P$1
N$76: C40.- LVLF2.B
N$77: IC11.2 R47.2 R48.1
N$78: LVLF2.W R47.1
N$79: C38.P$1 C41.+
N$80: C41.- LVLC2.B
N$81: IC10.6 R49.2 R50.1
N$82: LVLC2.W R49.1
N$83: C42.+ D6.P$1
N$84: C42.- LVLD2.B
N$85: IC10.2 R51.2 R52.1
N$86: LVLD2.W R51.1
N$87: A2.P$1 C43.+
N$88: C43.- LVLA2.B
N$89: IC9.6 R53.2 R54.1
N$90: LVLA2.W R53.1
N$91: B2.P$1 C44.+
N$92: C44.- LVLB2.B
N$93: IC9.2 R55.2 R56.1
N$94: LVLB2.W R55.1
N$95: LVLE2.W R45.1
N$96: C39.+ E2.P$1
N$97: R57.2 R58.2 R59.2 R60.2 R61.2 R62.2 VOL2.B
N$98: R63.1 VOL2.W
N$99: IC12.6 R63.2 R64.1
N$100: C45.+ IC12.7 R64.2 R66.1
N$101: C45.- EURO2.P$1
N$102: C46.- LINE2.P$1
N$103: C46.+ IC12.1 IC12.2
N$104: IC12.3 R65.2 R66.2
N$105: D7.C FB5.2
N$106: +2.1 D7.A
N$107: D8.A FB6.2
N$108: -2.1 D8.C
N$109: C58.- LVLE3.B
N$110: IC15.6 R67.2 R68.1
N$111: C59.+ F3.P$1
N$112: C59.- LVLF3.B
N$113: IC15.2 R69.2 R70.1
N$114: LVLF3.W R69.1
N$115: C57.P$1 C60.+
N$116: C60.- LVLC3.B
N$117: IC14.6 R71.2 R72.1
N$118: LVLC3.W R71.1
N$119: C61.+ D9.P$1
N$120: C61.- LVLD3.B
N$121: IC14.2 R73.2 R74.1
N$122: LVLD3.W R73.1
N$123: A3.P$1 C62.+
N$124: C62.- LVLA3.B
N$125: IC13.6 R75.2 R76.1
N$126: LVLA3.W R75.1
N$127: B3.P$1 C63.+
N$128: C63.- LVLB3.B
N$129: IC13.2 R77.2 R78.1
N$130: LVLB3.W R77.1
N$131: LVLE3.W R67.1
N$132: C58.+ E3.P$1
N$133: R79.2 R80.2 R81.2 R82.2 R83.2 R84.2 VOL3.B
N$134: R85.1 VOL3.W
N$135: IC16.6 R85.2 R86.1
N$136: C64.+ IC16.7 R86.2 R88.1
N$137: C64.- EURO3.P$1
N$138: C65.- LINE3.P$1
N$139: C65.+ IC16.1 IC16.2
N$140: IC16.3 R87.2 R88.2
N$141: D10.C FB7.2
N$142: +3.1 D10.A
N$143: D11.A FB8.2
N$144: -3.1 D11.C
N$145: C77.- LVLE4.B
N$146: IC19.6 R89.2 R90.1
N$147: C78.+ F4.P$1
N$148: C78.- LVLF4.B
N$149: IC19.2 R91.2 R92.1
N$150: LVLF4.W R91.1
N$151: C76.P$1 C79.+
N$152: C79.- LVLC4.B
N$153: IC18.6 R93.2 R94.1
N$154: LVLC4.W R93.1
N$155: C80.+ D12.P$1
N$156: C80.- LVLD4.B
N$157: IC18.2 R95.2 R96.1
N$158: LVLD4.W R95.1
N$159: A4.P$1 C81.+
N$160: C81.- LVLA4.B
N$161: IC17.6 R97.2 R98.1
N$162: LVLA4.W R97.1
N$163: B4.P$1 C82.+
N$164: C82.- LVLB4.B
N$165: IC17.2 R99.2 R100.1
N$166: LVLB4.W R99.1
N$167: LVLE4.W R89.1
N$168: C77.+ E4.P$1
N$169: R101.2 R102.2 R103.2 R104.2 R105.2 R106.2 VOL4.B
N$170: R107.1 VOL4.W
N$171: IC20.6 R107.2 R108.1
N$172: C83.+ IC20.7 R108.2 R110.1
N$173: C83.- EURO4.P$1
N$174: C84.- LINE4.P$1
N$175: C84.+ IC20.1 IC20.2
N$176: IC20.3 R109.2 R110.2
N$177: D13.C FB9.2
N$178: +4.1 D13.A
N$179: D14.A FB10.2
N$180: -4.1 D14.C
N$181: C96.- LVLE5.B
N$182: IC23.6 R111.2 R112.1
N$183: C97.+ F5.P$1
N$184: C97.- LVLF5.B
N$185: IC23.2 R113.2 R114.1
N$186: LVLF5.W R113.1
N$187: C95.P$1 C98.+
N$188: C98.- LVLC5.B
N$189: IC22.6 R115.2 R116.1
N$190: LVLC5.W R115.1
N$191: C99.+ D15.P$1
N$192: C99.- LVLD5.B
N$193: IC22.2 R117.2 R118.1
N$194: LVLD5.W R117.1
N$195: A5.P$1 C100.+
N$196: C100.- LVLA5.B
N$197: IC21.6 R119.2 R120.1
N$198: LVLA5.W R119.1
N$199: B5.P$1 C101.+
N$200: C101.- LVLB5.B
N$201: IC21.2 R121.2 R122.1
N$202: LVLB5.W R121.1
N$203: LVLE5.W R111.1
N$204: C96.+ E5.P$1
N$205: R123.2 R124.2 R125.2 R126.2 R127.2 R128.2 VOL5.B
N$206: R129.1 VOL5.W
N$207: IC24.6 R129.2 R130.1
N$208: C102.+ IC24.7 R130.2 R132.1
N$209: C102.- EURO5.P$1
N$210: C103.- LINE5.P$1
N$211: C103.+ IC24.1 IC24.2
N$212: IC24.3 R131.2 R132.2
N$213: D16.C FB11.2
N$214: +5.1 D16.A
N$215: D17.A FB12.2
N$216: -5.1 D17.C